# EAGLE board CT_schematic (EAGLE 7.6.0)

Size 100 x 80 mm. Coordinates in mm from the lower left corner, seen from the top.
Outline: 0,0 100,0 100,80 0,80 0,0
Copper layers (1*16): Top 0.035mm / dielectric 1.5mm / Bottom 0.035mm
Design rules "default": minimum track width 10mil, minimum drill 24mil, track to track 8mil, track to pad 8mil, pad to pad 8mil, via to via 8mil, smd to smd 8mil, copper to edge 40mil, drill to drill 8mil, minimum pad ring 10mil, minimum via ring 8mil, stop-mask expansion 4mil, vias tented up to drill 0mil, thermal gap 10mil

## Footprints (pad centres in the part's own frame; a part is rotated, then mirrored left to right if it is on the bottom)
C0603 = smd 0.8 x 0.8: 1 -0.762,0; 2 0.762,0
C0402 = smd 0.5 x 0.5: 1 -0.508,0; 2 0.508,0
C1210 = smd 1.2 x 2.5: 1 -1.524,0; 2 1.524,0
C0805 = smd 1.2 x 1.3: 1 -1.016,0; 2 1.016,0
C1206 = smd 1.3 x 1.6: 1 -1.524,0; 2 1.524,0
EXV-9H = smd 3.505 x 1.676: 1 -2.857,0; 2 2.857,0
L0603 = smd 0.8 x 0.8: 1 -0.762,0; 2 0.762,0
PJ-037B_PACKAGE = drill 3.7 square: 1 12,0 | drill 3.2 square: 2 6,0
R0603 = smd 0.8 x 0.8: 1 -0.762,0; 2 0.762,0
LQFP48 = smd 0.3 x 1.2: 1 -2.75,-4.25; 2 -2.25,-4.25; 3 -1.75,-4.25; 4 -1.25,-4.25; 5 -0.75,-4.25; 6 -0.25,-4.25; 7 0.25,-4.25; 8 0.75,-4.25; 9 1.25,-4.25; 10 1.75,-4.25; 11 2.25,-4.25; 12 2.75,-4.25; 25 2.75,4.25; 26 2.25,4.25; 27 1.75,4.25; 28 1.25,4.25; 29 0.75,4.25; 30 0.25,4.25; 31 -0.25,4.25; 32 -0.75,4.25; 33 -1.25,4.25; 34 -1.75,4.25; 35 -2.25,4.25; 36 -2.75,4.25 | smd 1.2 x 0.3: 13 4.25,-2.75; 14 4.25,-2.25; 15 4.25,-1.75; 16 4.25,-1.25; 17 4.25,-0.75; 18 4.25,-0.25; 19 4.25,0.25; 20 4.25,0.75; 21 4.25,1.25; 22 4.25,1.75; 23 4.25,2.25; 24 4.25,2.75; 37 -4.25,2.75; 38 -4.25,2.25; 39 -4.25,1.75; 40 -4.25,1.25; 41 -4.25,0.75; 42 -4.25,0.25; 43 -4.25,-0.25; 44 -4.25,-0.75; 45 -4.25,-1.25; 46 -4.25,-1.75; 47 -4.25,-2.25; 48 -4.25,-2.75
SOIC-8 = smd 1.6 x 0.6: 1 -2.7,1.905 | smd 1.55 x 0.6: 2 -2.7,0.635; 3 -2.7,-0.635; 4 -2.7,-1.905; 5 2.7,-1.905; 6 2.7,-0.635; 7 2.7,0.635; 8 2.7,1.905
DFN8-S = smd 0.6 x 0.4: 1 -2.69,1.905; 2 -2.69,0.635; 3 -2.69,-0.635; 4 -2.69,-1.905; 5 2.69,-1.905; 6 2.69,-0.635; 7 2.69,0.635; 8 2.69,1.905
QFN-28 = smd 0.813 x 0.305: 1 -2.451,1.5; 2 -2.451,1; 3 -2.451,0.5; 4 -2.451,0; 5 -2.451,-0.5; 6 -2.451,-1; 7 -2.451,-1.5; 15 2.451,-1.5; 16 2.451,-1; 17 2.451,-0.5; 18 2.451,0; 19 2.451,0.5; 20 2.451,1; 21 2.451,1.5 | smd 0.305 x 0.813: 8 -1.5,-2.451; 9 -1,-2.451; 10 -0.5,-2.451; 11 0,-2.451; 12 0.5,-2.451; 13 1,-2.451; 14 1.5,-2.451; 22 1.5,2.451; 23 1,2.451; 24 0.5,2.451; 25 0,2.451; 26 -0.5,2.451; 27 -1,2.451; 28 -1.5,2.451 | smd 3.607 x 3.607: 29 0,0
SJ-43515TS-SMT-TR = smd 2.2 x 3: 1 0.6,-7.4; 4 3.4,-7.4 | smd 3 x 3: 2 12.8,-7.4; 5 17,-3 | smd 2 x 3: 3 5.3,0; 6 2.5,0 | drill 1.8: P$7 4.5,-3.69; P$8 11.54,-3.69
ASEK = smd 1.4 x 1: 1 -1.1,-0.8; 2 1.1,-0.8; 3 1.1,0.8; 4 -1.1,0.8
ASFL1 = smd 1.7 x 1.5: 1 -1.27,-1.1; 2 1.27,-1.1; 3 1.27,1.1; 4 -1.27,1.1
ASDMB-XX.XXXXMHZ-XX-XX-XXX = smd 0.65 x 0.85: 1 0.45,0.2; 2 2.05,0.2; 3 2.05,1.8; 4 0.45,1.8
WSON-8 = smd 0.3 x 0.6: 1 -0.75,0; 2 0.05,0; 3 0.85,0; 4 1.65,0; 5 1.65,3.8; 6 0.85,3.8; 7 0.05,3.8; 8 -0.75,3.8 | smd 3 x 2.6: PAD 0.45,1.9
SON-6 = smd 0.55 x 0.3: 1 -0.355,0.5 | smd 0.52 x 0.3: 2 -0.37,0; 3 -0.37,-0.5; 4 0.37,-0.5; 5 0.37,0; 6 0.37,0.5
SW_4-1437565-2 = smd 1.4 x 2.1: 1 -2.23,4.55; 2 -2.23,-4.55; 3 2.23,4.55; 4 2.23,-4.55
LGM67K-G1J2-24-Z = smd 0.8 x 1.4: A -2,0; C 0,0
NC7SZ125M5X = smd 1.3 x 0.7: 1 -1.3,0.95; 2 -1.3,0; 3 -1.3,-0.95; 4 1.3,-0.95; 5 1.3,0.95
DUMMY_PACKAGE_179 = drill 0.3: 1 0,-1; 2 1.5,-1; 3 3,-1

## Placement (x,y rotation side)
C1  1e-06  [C0603]  -15.24,74.93 0 top  (outside the outline)
C2  1e-07  [C0603]  -19.05,74.93 0 top  (outside the outline)
C3  1e-07  [C0603]  -22.86,74.93 0 top  (outside the outline)
C4  1e-07  [C0603]  -26.67,74.93 0 top  (outside the outline)
C5  4.7e-06  [C0603]  -74.93,69.85 0 top  (outside the outline)
C6  1e-07  [C0603]  -30.48,74.93 0 top  (outside the outline)
C7  1e-07  [C0603]  -34.29,74.93 0 top  (outside the outline)
C8  1e-08  [C0603]  -38.1,74.93 0 top  (outside the outline)
C9  1e-06  [C0603]  -41.91,74.93 0 top  (outside the outline)
C10  1e-08  [C0402]  -19.05,80.01 0 top  (outside the outline)
C11  1e-08  [C0402]  -22.86,80.01 0 top  (outside the outline)
C12  2.2e-05  [C1210]  -38.1,58.42 0 top  (outside the outline)
C13  2.2e-05  [C1210]  -44.45,58.42 0 top  (outside the outline)
C14  1e-09  [C0402]  -26.67,80.01 0 top  (outside the outline)
C15  1e-09  [C0402]  -30.48,80.01 0 top  (outside the outline)
C16  1e-07  [C0402]  -34.29,80.01 0 top  (outside the outline)
C17  1e-07  [C0402]  -38.1,80.01 0 top  (outside the outline)
C18  1e-07  [C0402]  -41.91,80.01 0 top  (outside the outline)
C19  1e-07  [C0402]  -45.72,80.01 0 top  (outside the outline)
C20  1e-07  [C0402]  -49.53,80.01 0 top  (outside the outline)
C21  1e-05  [C0805]  -68.58,58.42 0 top  (outside the outline)
C22  1e-05  [C0805]  -73.66,58.42 0 top  (outside the outline)
C23  1e-05  [C0805]  -15.24,64.77 0 top  (outside the outline)
C24  1e-05  [C0805]  -20.32,64.77 0 top  (outside the outline)
C25  1e-05  [C0805]  -25.4,64.77 0 top  (outside the outline)
C26  1e-08  [C0402]  -53.34,80.01 0 top  (outside the outline)
C27  1e-08  [C0402]  -57.15,80.01 0 top  (outside the outline)
C28  1e-08  [C0402]  -60.96,80.01 0 top  (outside the outline)
C29  1e-08  [C0402]  -64.77,80.01 0 top  (outside the outline)
C30  1e-05  [C1206]  -57.15,58.42 0 top  (outside the outline)
C31  1e-05  [C0805]  -30.48,64.77 0 top  (outside the outline)
C32  1e-06  [C0603]  -45.72,74.93 0 top  (outside the outline)
C33  1e-05  [C1210]  -50.8,58.42 0 top  (outside the outline)
C34  1e-07  [C0402]  -68.58,80.01 0 top  (outside the outline)
C35  0.0001  [EXV-9H]  -60.96,49.53 0 top  (outside the outline)
C36  0.0001  [EXV-9H]  -72.39,49.53 0 top  (outside the outline)
C37  1e-08  [C0402]  -72.39,80.01 0 top  (outside the outline)
F1  240.0  [L0603]  -49.53,74.93 0 top  (outside the outline)
J1  PJ-037B  [PJ-037B_PACKAGE]  -27.94,29.21 0 top  (outside the outline)
R1  10000.0  [R0603]  -66.04,64.77 0 top  (outside the outline)
R2  1000.0  [R0603]  -53.34,74.93 0 top  (outside the outline)
R3  910.0  [R0603]  -57.15,74.93 0 top  (outside the outline)
R4  4700.0  [R0603]  -60.96,74.93 0 top  (outside the outline)
R5  2200.0  [R0603]  -64.77,74.93 0 top  (outside the outline)
R6  2200.0  [R0603]  -68.58,74.93 0 top  (outside the outline)
R7  10000.0  [R0603]  -71.12,64.77 0 top  (outside the outline)
R8  10000.0  [R0603]  -76.2,64.77 0 top  (outside the outline)
R9  10000.0  [R0603]  -15.24,69.85 0 top  (outside the outline)
R10  10000.0  [R0603]  -20.32,69.85 0 top  (outside the outline)
R11  10000.0  [R0603]  -25.4,69.85 0 top  (outside the outline)
R12  10000.0  [R0603]  -30.48,69.85 0 top  (outside the outline)
R13  10000.0  [R0603]  -35.56,69.85 0 top  (outside the outline)
R14  10000.0  [R0603]  -40.64,69.85 0 top  (outside the outline)
R15  47000.0  [R0603]  -45.72,69.85 0 top  (outside the outline)
R16  47000.0  [R0603]  -50.8,69.85 0 top  (outside the outline)
R17  47000.0  [R0603]  -55.88,69.85 0 top  (outside the outline)
R18  680.0  [R0603]  -72.39,74.93 0 top  (outside the outline)
R19  100000.0  [R0603]  -40.64,64.77 0 top  (outside the outline)
R20  806.0  [R0603]  -76.2,74.93 0 top  (outside the outline)
R21  1000.0  [R0603]  -15.24,80.01 0 top  (outside the outline)
R22  100000.0  [R0603]  -45.72,64.77 0 top  (outside the outline)
R23  153694.38  [R0603]  -35.56,64.77 0 top  (outside the outline)
R24  100000.0  [R0603]  -50.8,64.77 0 top  (outside the outline)
R25  10000.0  [R0603]  -60.96,69.85 0 top  (outside the outline)
R26  10000.0  [R0603]  -66.04,69.85 0 top  (outside the outline)
R27  82000.0  [R0603]  -71.12,69.85 0 top  (outside the outline)
R28  300000.0  [R0603]  -55.88,64.77 0 top  (outside the outline)
R29  120000.0  [R0603]  -60.96,64.77 0 top  (outside the outline)
U1  stm32f078cbt7  [LQFP48]  -58.42,27.94 0 top  (outside the outline)
U2  AT25010B-SSHL-T  [SOIC-8]  -24.13,40.64 0 top  (outside the outline)
U3  24AA512-I/MF  [DFN8-S]  -73.66,27.94 0 top  (outside the outline)
U4  WM8731CLSEFL  [QFN-28]  -30.48,58.42 0 top  (outside the outline)
U5  SJ-43515TS-SMT-TR  [SJ-43515TS-SMT-TR]  -45.72,10.16 0 top  (outside the outline)
U6  SJ-43515TS-SMT-TR  [SJ-43515TS-SMT-TR]  -73.66,10.16 0 top  (outside the outline)
U7  ASEK-2-32.768KHz-ECST  [ASEK]  -52.07,49.53 0 top  (outside the outline)
U8  ASFL1-12.288MHZ-EC-T  [ASFL1]  -30.48,50.8 0 top  (outside the outline)
U9  ASDMB-25.000MHZ-EC-T  [ASDMB-XX.XXXXMHZ-XX-XX-XXX]  -16.51,1.27 0 top  (outside the outline)
U10  LP3878SDX-ADJ/NOPB  [WSON-8]  -45.72,39.37 0 top  (outside the outline)
U11  LP2951ACSDX/NOPB  [WSON-8]  -63.5,39.37 0 top  (outside the outline)
U12  TPS3895ADRYR  [SON-6]  -20.32,83.82 0 top  (outside the outline)
U13  4-1437565-2  [SW_4-1437565-2]  -44.45,27.94 0 top  (outside the outline)
U14  Q65110A2395  [LGM67K-G1J2-24-Z]  -17.78,58.42 0 top  (outside the outline)
U15  nc7sz125m5x  [NC7SZ125M5X]  -62.23,57.15 0 top  (outside the outline)
U16  Dummy  [DUMMY_PACKAGE_179]  -17.78,85.09 0 top  (outside the outline)

## Library data of the parts
C1-C37 F1 J1 R1-R29 U1-U16 = circuit_tree

## Nets
CLK_U1_3: U1.3 U7.3
CLK_U1_5: U1.5 U9.3
CLK_U4_1: U4.1 U8.3
GND: C1.2 C2.2 C3.2 C4.2 C5.2 C6.2 C7.2 C8.2 C9.2 C10.2 C11.2 C15.2 C16.2 C17.2 C18.2 C19.2 C20.2 C21.2 C22.2 C23.2 C24.2 C25.2 C26.2 C27.2 C28.2 C29.2 C30.2 C31.2 C32.2 C33.2 C34.2 C35.2 C36.2 C37.2 J1.2 R2.2 R7.2 R8.2 R13.2 R14.2 R15.2 R16.2 R17.2 R21.2 R24.2 R27.2 R29.2 U1.8 U1.23 U1.35 U1.47 U2.4 U3.4 U3.7 U4.4 U4.15 U4.19 U4.25 U4.26 U4.29 U5.1 U6.1 U7.2 U8.2 U9.2 U10.3 U10.PAD U11.3 U11.4 U11.PAD U12.2 U14.C U15.1 U15.3 U16.1
NET_U1_7: R4.1 U1.7 U15.4
NET_U1_9: C8.1 C9.1 F1.1 U1.9
NET_U1_20: R8.1 U1.20
NET_U1_42: R5.1 U1.42 U3.6
NET_U1_43: R6.1 U1.43 U3.5
NET_U1_44: R7.1 U1.44
NET_U1_45: R3.1 U1.45 U14.A
NET_U1_46: R1.1 U1.46 U13.3 U13.4
NET_U2_3: R9.1 U2.3
NET_U2_7: R11.1 U2.7
NET_U3_1: R12.1 U3.1
NET_U3_2: R13.1 U3.2
NET_U3_3: R14.1 U3.3
NET_U4_9: U4.9
NET_U4_20: C20.1 C25.1 U4.20
NET_U5_2: C13.1 R16.1 U5.2
NET_U5_5: C12.1 R15.1 U5.5
NET_U5_13: C12.2
NET_U5_14: C13.2
NET_U6_5: C14.1 C15.1 R17.1 R18.1 U6.5
NET_U6_21: R18.2
NET_U6_22: C14.2
NET_U10_1: C29.1 U10.1
NET_U10_6: R20.2 R21.1 U10.6
NET_U10_8: R19.1 U10.8
NET_U11_5: R22.1 U11.5
NET_U11_7: R23.2 R24.1 U11.7
NET_U12_1: R26.1 R27.1 U12.1
NET_U12_3: R28.2 R29.1 U12.3
NET_U12_4: R25.1 U12.4 U15.2
NET_U13_1: R2.1 U13.1 U13.2
PROC_I2S1_CK: U1.39 U4.7
PROC_I2S1_SD: U1.41 U4.8
PROC_I2S1_WS: U1.38 U4.9 U4.11
PROC_SPI1_MISO: U1.16 U2.2
PROC_SPI1_MOSI: U1.17 U2.5
PROC_SPI1_NSS: R10.1 U1.14 U2.1
PROC_SPI1_SCK: U1.15 U2.6
PROC_TIM1_CH2: U1.30 U16.2
PROC_TIM1_CH4: U1.32 U16.3
VCC_S1_6V8: C30.1 C32.1 C35.1 C36.1 J1.1 R19.2 U10.4 U11.8
VCC_TIER1_1V8: C1.1 C2.1 C3.1 C4.1 C5.1 C6.1 C7.1 C10.1 C11.1 C16.1 C17.1 C18.1 C19.1 C21.1 C22.1 C23.1 C24.1 C26.1 C28.1 C31.1 C34.1 C37.1 F1.2 R1.2 R3.2 R4.2 R5.2 R6.2 R9.2 R10.2 R11.2 R12.2 R20.1 R25.2 R26.2 R28.1 U1.1 U1.24 U1.36 U1.48 U2.8 U3.8 U4.3 U4.5 U4.12 U4.18 U7.4 U9.4 U10.5 U12.6 U15.5
VCC_TIER1_3V3: C27.1 C33.1 R22.2 R23.1 U8.4 U11.1

## Tracks (layer width: path | path; a pad name or v marks a point on that pad's centre or on a via)
CLK_U1_3  (1 unrouted)
CLK_U1_5  (1 unrouted)
CLK_U4_1  (1 unrouted)
GND  (74 unrouted)
NET_U1_7  (2 unrouted)
NET_U1_9  (3 unrouted)
NET_U1_20  (1 unrouted)
NET_U1_42  (2 unrouted)
NET_U1_43  (2 unrouted)
NET_U1_44  (1 unrouted)
NET_U1_45  (2 unrouted)
NET_U1_46  (3 unrouted)
NET_U2_3  (1 unrouted)
NET_U2_7  (1 unrouted)
NET_U3_1  (1 unrouted)
NET_U3_2  (1 unrouted)
NET_U3_3  (1 unrouted)
NET_U4_20  (2 unrouted)
NET_U5_2  (2 unrouted)
NET_U5_5  (2 unrouted)
NET_U6_5  (4 unrouted)
NET_U10_1  (1 unrouted)
NET_U10_6  (2 unrouted)
NET_U10_8  (1 unrouted)
NET_U11_5  (1 unrouted)
NET_U11_7  (2 unrouted)
NET_U12_1  (2 unrouted)
NET_U12_3  (2 unrouted)
NET_U12_4  (2 unrouted)
NET_U13_1  (2 unrouted)
PROC_I2S1_CK  (1 unrouted)
PROC_I2S1_SD  (1 unrouted)
PROC_I2S1_WS  (2 unrouted)
PROC_SPI1_MISO  (1 unrouted)
PROC_SPI1_MOSI  (1 unrouted)
PROC_SPI1_NSS  (2 unrouted)
PROC_SPI1_SCK  (1 unrouted)
PROC_TIM1_CH2  (1 unrouted)
PROC_TIM1_CH4  (1 unrouted)
VCC_S1_6V8  (7 unrouted)
VCC_TIER1_1V8  (50 unrouted)
VCC_TIER1_3V3  (5 unrouted)